# Altium PCB Driver.PcbDoc
Units mm, origin at the board's own origin, x right, y up, seen from the top; angles counter-clockwise.
Board outline 50 x 50 mm, 2 copper layers (Top Layer, Bottom Layer); 21 components, 15 nets, 54 pads, 6 vias.
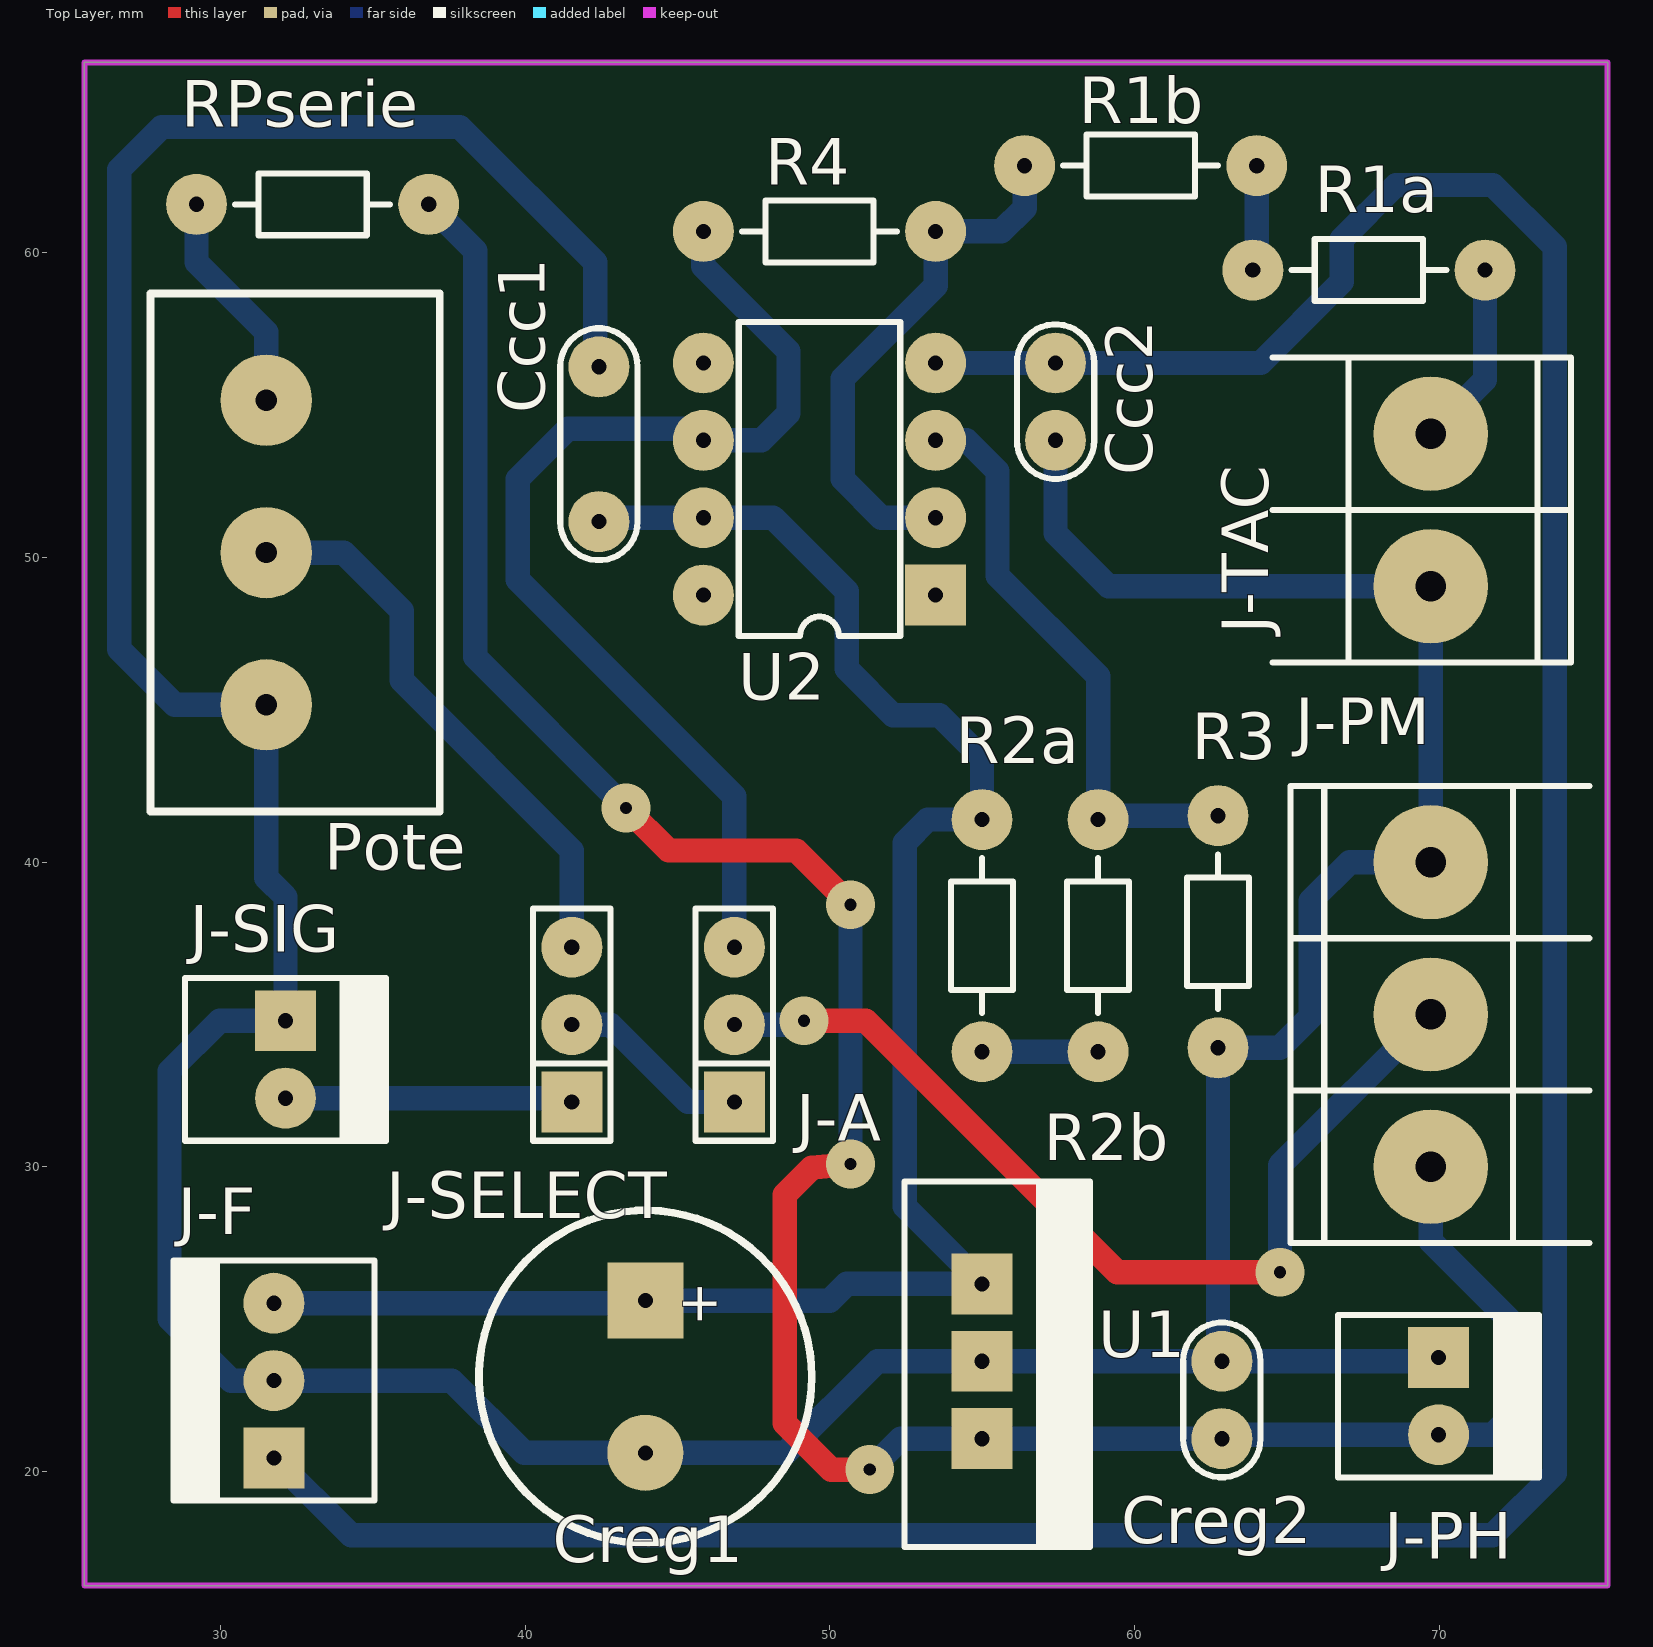
[diagram p0: Top Layer view]
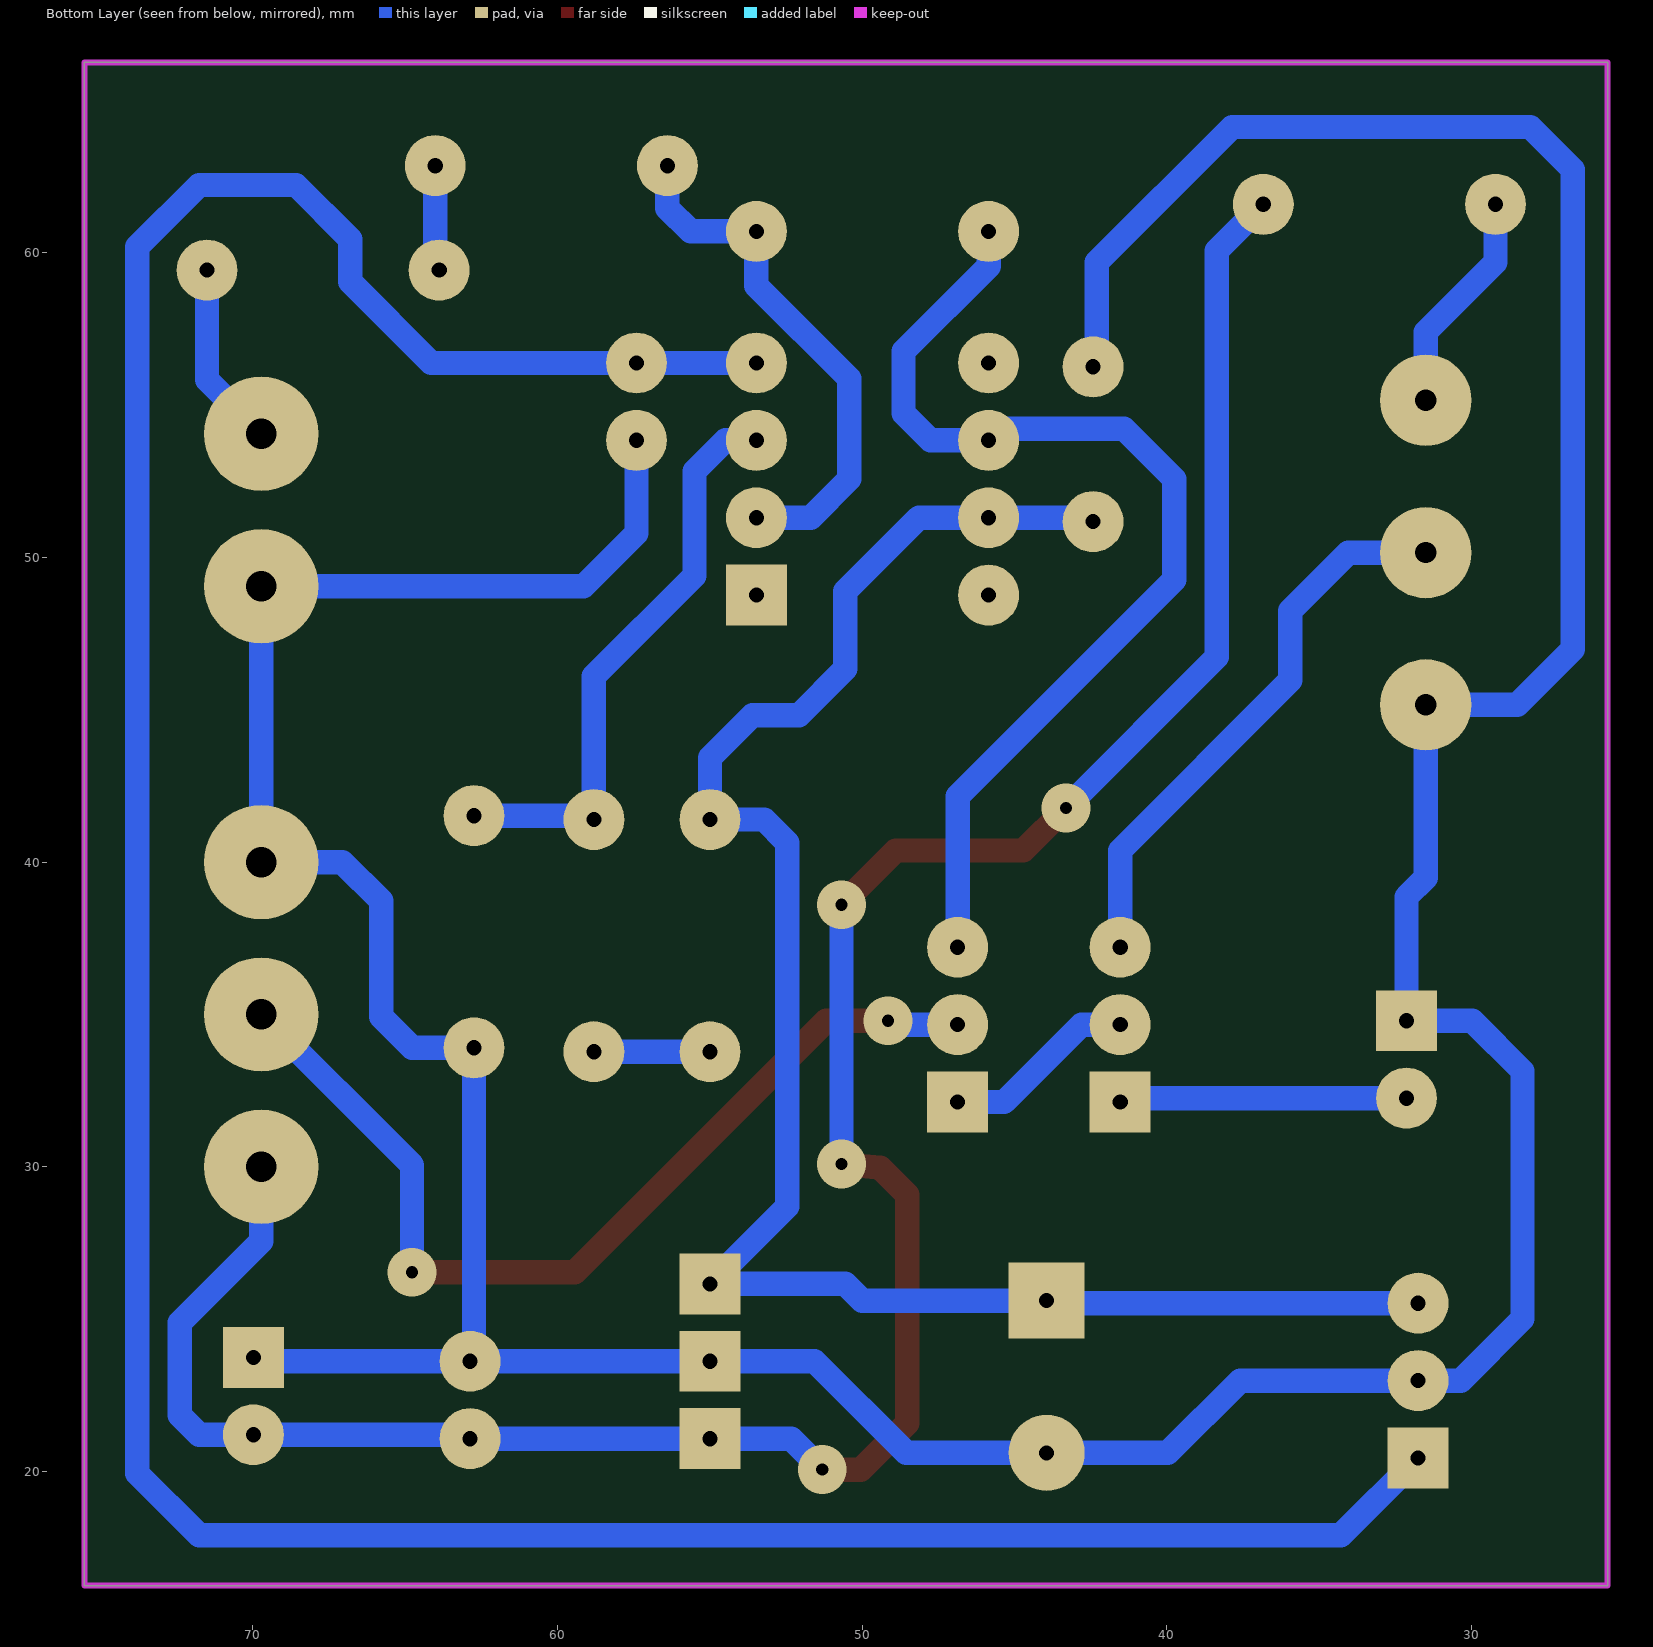
[diagram p1: Bottom Layer view, seen from below]
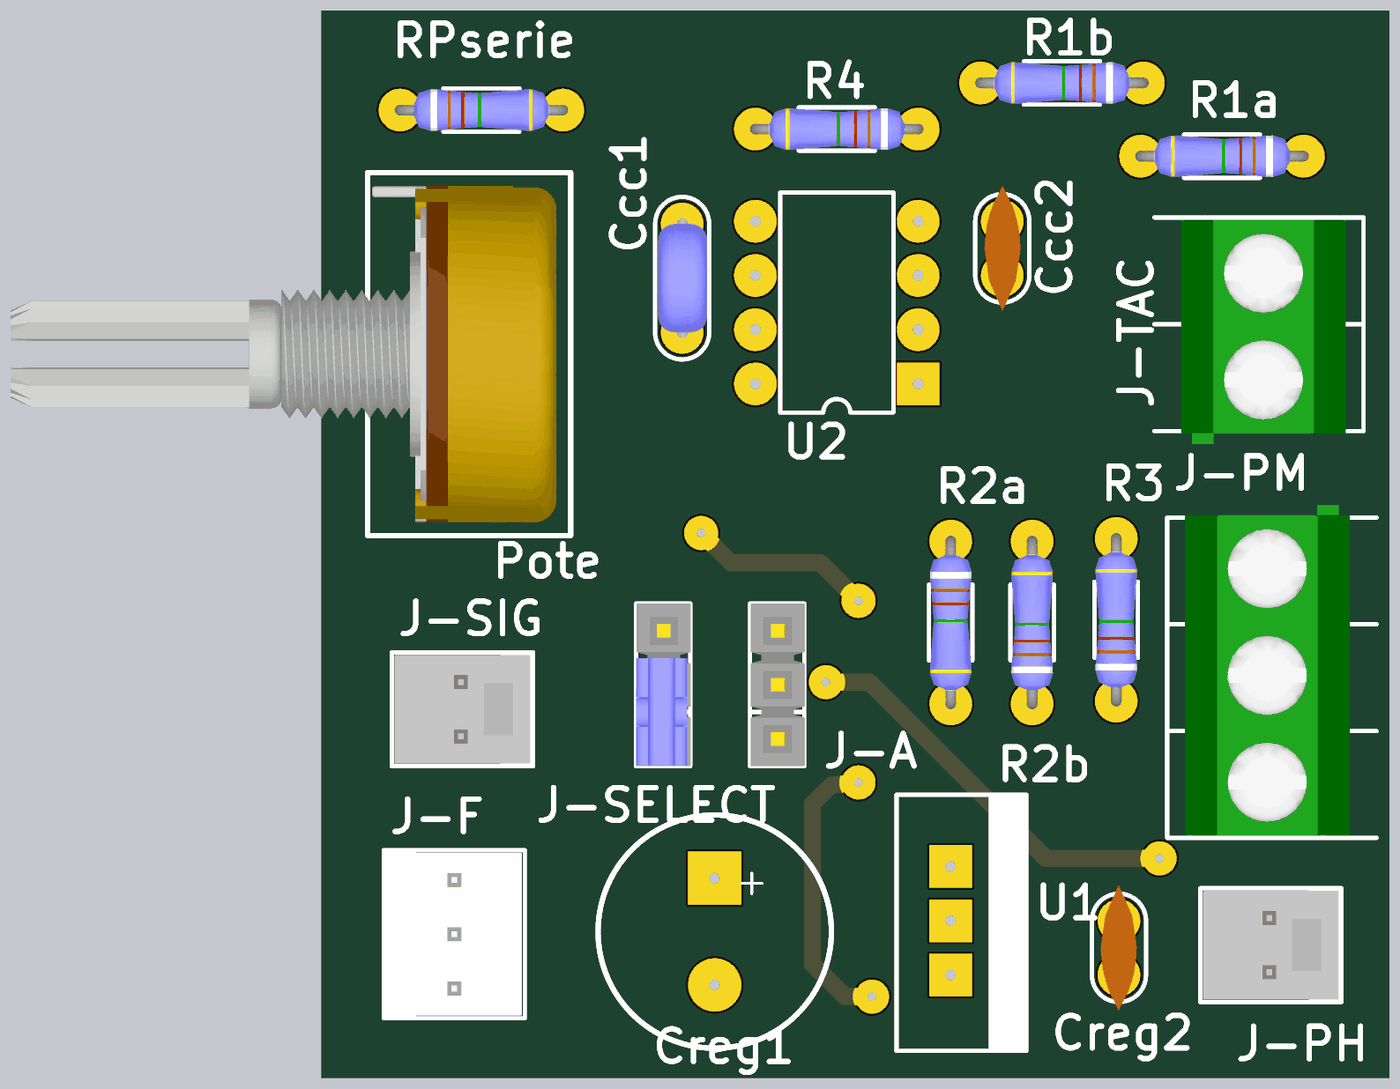
[diagram p2: 3D render of the assembled board from above, using the file's embedded part models]

## Layer stack, top to bottom
Top Solder: solder mask 0.0102, Solder Resist, Dk 3.5
Top Layer: signal copper 0.0356
Dielectric 1: dielectric 0.32, FR-4, Dk 4.8
Bottom Layer: signal copper 0.0356
Bottom Solder: solder mask 0.0102, Solder Resist, Dk 3.5

## Board outline
25.527,16.256 75.527,16.256 75.527,66.256 25.527,66.256

## Design rules (kind name [scope] priority, off if disabled: settings)
Clearance [All] p1: gap=0.3 ignorepadtopadclearanceinfootprint=FALSE
PolygonConnect [All] p1: connectstyle=Relief reliefconductorwidth=0.254 reliefentries=4 polygonreliefangle="90 Angle" airgapwidth=0.254
RoutingVias [All] p1: holewidth=0.6 width=2 viastyle="Through Hole" minholewidth=0.6 minwidth=2 maxholewidth=0.6 maxwidth=2
SolderMaskExpansion [All] p1: expansion=0.102
Width [All] p1: maxlimit=0.9 minlimit=0.6 preferedwidth=0.8
30 further rules are at their usual default settings.

## Components (designator, comment, footprint, x,y, rotation, side; value= is the part's Value field where it differs from the comment)
Ccc1 "100n" CAP200 42.418,53.721 r90 top
Ccc2 "100n" CAP100 57.404,55.118 r270 top
Creg1 "330u" CAP200RP 43.942,23.114 r270 top
Creg2 "100n" CAP100 62.865,22.352 r90 top
J-A "ARDUINO" SIP3 46.863,34.671 r90 top
J-F "FUENTE" MOLEX3 31.75,20.447 r90 top
J-PH "PUENTE H" MOLEX2 69.977,23.749 r270 top
J-PM "POTE MOTOR" BORNERA3 69.723,35.005 r0 top
J-SELECT "A2 SELECT" JUMPER3 41.529,34.671 r90 top
J-SIG "SEÑAL" MOLEX2 32.131,34.798 r270 top
J-TAC "TACOMETRO" BORNERA2 69.723,51.562 r180 top
Pote "5K" POTENCIOMETRO 31.496,50.165 r270 top
R1a "3K9" RES300 71.501,59.436 r180 top
R1b "100" RES300 64.008,62.865 r180 top
R2a "3K9" RES300 54.991,41.402 r270 top
R2b "100" RES300 58.801,33.782 r90 top
R3 "1K" RES300 62.738,33.909 r90 top
R4 "1K" RES300 53.467,60.706 r180 top
RPserie "1K" RES300 29.21,61.595 r0 top
U1 "7806" "TO-220 V" 54.991,23.622 r270 top
U2 "TL081JG" JG008 49.657,52.578 r90 top

## Footprints (in the part's own frame and the unit in brackets; to place one, negate y for a bottom-side part, rotate by r counter-clockwise, add the part's x,y. Pads: shape width x height; smd on the part's side, far side on the other; paste and mask are expansions set on the pad)
BORNERA2 [mm] "Bornera con Tornillos 5mm separación"
  round 3.75 hole 1: 1(0,2.5) 2(0,-2.5)
  silkscreen extent -4.6,-5 5.2,5, body extent -3.76,-4.89 3.94,5.61, height 10
BORNERA3 [mm] "Bornera con Tornillos 5mm separación"
  round 3.75 hole 1: 1(0,5) 2(0,0) 3(0,-5)
  silkscreen extent -4.6,-7.5 5.2,7.5, body extent -3.76,-7.39 3.94,8.11, height 10.05
CAP100 [mm]
  round 2 hole 0.5: 1(-1.27,0) 2(1.27,0)
  silkscreen extent -2.54,-1.27 2.54,1.27, body extent -2.92,-0.84 2.92,0.86, height 6.12
CAP200 [mm]
  round 2 hole 0.5: 1(-2.54,0) 2(2.54,0)
  silkscreen extent -3.81,-1.27 3.81,1.27, body extent -2.79,-1.17 2.79,1.12, height 6.24
CAP200RP [mm] "Body Diameter 10.33mm"
  rect 2.5x2.5 hole 0.5: 1(-2.5,0)
  round 2.5 hole 0.5: 2(2.5,0)
  silkscreen extent -5.46,-5.46 5.46,5.46, body extent -5.2,-5.18 5.18,5.21, height 20
JG008 [mm] "DIP; 8 Leads; Row Spacing 7.62 mm; Pitch 2.54 mm"
  rect 2x2 hole 0.5: 1(-3.81,-3.81)
  round 2 hole 0.5: 2(-1.27,-3.81) 3(1.27,-3.81) 4(3.81,-3.81) 5(3.81,3.81) 6(1.27,3.81) 7(-1.27,3.81) 8(-3.81,3.81)
  silkscreen extent -5.15,-2.65 5.15,2.65
JUMPER3 [mm]
  rect 2x2 hole 0.5: 1(-2.54,0)
  round 2 hole 0.5: 2(0,0) 3(2.54,0)
  silkscreen extent -3.81,-1.27 3.81,1.27, body extent -3.81,-1.3 3.81,1.27, height 16.15
MOLEX2 [mm]
  rect 2x2 hole 0.5: 1(0,0)
  round 2 hole 0.5: 2(2.54,0)
  silkscreen extent -1.4,-3.3 3.94,3.3, body extent -1.27,-3.18 3.81,3.18, height 10.74
MOLEX3 [mm]
  rect 2x2 hole 0.5: 1(0,0)
  round 2 hole 0.5: 2(2.54,0) 3(5.08,0)
  silkscreen extent -1.4,-3.3 6.48,3.3, body extent -1.27,-3.17 6.35,3.18, height 10.74
POTENCIOMETRO [mm]
  round 3 hole 0.7: 1(-5,0) 2(0,0) 3(5,0)
  silkscreen extent -8.5,-3.8 8.5,5.7, body extent -7.87,-20.53 7.87,5.03, height 20.12
RES300 [mm]
  round 2 hole 0.5: 1(0,0) 2(7.62,0)
  silkscreen extent 1.27,-1.02 6.35,1.02, body extent -0.25,-0.97 7.87,0.97, height 2.01
SIP3 [mm]
  rect 2x2 hole 0.5: 1(-2.54,0)
  round 2 hole 0.5: 2(0,0) 3(2.54,0)
  silkscreen extent -3.81,-1.27 3.81,1.27, body extent -3.81,-1.3 3.81,1.24, height 8.38
"TO-220 V" [mm]
  rect 2x2 hole 0.5: 1(-2.54,0) 2(0,0) 3(2.54,0)
  silkscreen extent -5.9,-2.54 6.1,3.54, body extent -5,-2 5,3, height 18

## Part data
Ccc1 Ccc2 Creg2: library part CAP
Creg1: library part CAPPOL
J-A: library part CON3
J-F: library part MOLEX3
J-PH J-SIG: library part MOLEX2
J-PM: library part "BORNERA 3"
J-SELECT: library part JUMPER3
J-TAC: library part "BORNERA 2"
Pote: library part POTENCIOMETRO
R1a R1b R2a R2b R3 R4 RPserie: library part RES
U1: library part 78XX, "REGULDOR POSITIVO"
U2: "JFET-Input Operational Amplifier", ComponentLink1Description="Manufacturer Link", ComponentLink1URL=http://www.ti.com/, ComponentLink2Description=Datasheet, ComponentLink2URL=http://www-s.ti.com/sc/ds/tl081.pdf, DatasheetVersion=Feb-1999, LatestRevisionDate=04-Mar-2005, LatestRevisionNote="Stylized 3D Model Added.", Note="Pin 8 is not connected", PackageDescription="DIP; 8 Leads; Row Spacing 7.62 mm; Pitch 2.54 mm", PackageReference=JG008, PackageVersion=Jan-1995, Published=16-Jan-2001, Publisher="Altium Limited"

## Via types
v1: diameter 1.6, hole 0.4, Top Layer to Bottom Layer, 6 vias

## Nets (pads, with @x,y where several pads share a name; then routed paths per layer and width w, separated by ;. In a path a pad name is that pad's centre, name@x,y a point inside that pad or via, vN(x,y) a via of type N, cw(c..) or ccw(c..) an arc to the next point about the centre after c; other vN are vias at no path point)
+6V: Creg2.1 J-PH.2 J-PM.3 RPserie.2 U1.3 | length 84.2
  Top Layer w0.8: v1(43.307,41.783) 44.704,40.386 48.895,40.386 49.657,39.624 v1(50.673,38.608) ; v1(50.673,30.099) 49.403,29.972 48.514,29.083 48.514,21.59 50.038,20.066 v1(51.308,20.066)
  Bottom Layer w0.8: RPserie.2 38.354,60.071 38.354,46.736 v1(43.307,41.783) ; v1(50.673,30.099) v1(50.673,38.608) ; v1(51.308,20.066) 52.324,21.082 U1.3 Creg2.1 62.992,21.209 J-PH.2 71.755,21.209 72.39,21.844 72.39,24.892 69.723,27.559 J-PM.3
+10V: Ccc1.1 Creg1.1 J-F.3 R2a.1 U1.1 U2.7 | length 61.3
  Bottom Layer w0.8: J-F.3 43.855,25.527 Creg1.1 49.998,25.614 50.546,26.162 U1.1 52.451,28.702 52.451,40.64 53.213,41.402 R2a.1 54.991,43.434 53.594,44.831 52.07,44.831 50.546,46.355 50.546,48.895 48.133,51.308 U2.7 42.545,51.308 Ccc1.1
-10V: Ccc2.1 J-F.1 U2.4 | length 108.6
  Bottom Layer w0.8: J-F.1 34.29,17.907 71.755,17.907 73.787,19.939 73.787,60.198 71.755,62.23 68.58,62.23 66.802,60.452 66.802,59.055 64.135,56.388 Ccc2.1 U2.4
A0: J-A.3 R4.2 U2.6 | length 35.5
  Bottom Layer w0.8: R4.2 45.847,59.563 48.641,56.769 48.641,54.737 47.752,53.848 U2.6 45.466,54.229 41.402,54.229 39.751,52.578 39.751,49.276 46.863,42.164 J-A.3
A1: J-A.2 J-PM.2 | length 31.6
  Top Layer w0.8: v1(49.149,34.798) 51.181,34.798 59.436,26.543 v1(64.77,26.543)
  Bottom Layer w0.8: J-A.2 v1@48.895,34.671 ; v1(64.77,26.543) 64.77,30.052 J-PM.2
A2: J-A.1 J-SELECT.2 | length 6.4
  Bottom Layer w0.8: J-SELECT.2 42.799,34.671 45.339,32.131 J-A.1
GND: Ccc1.2 Ccc2.2 Creg1.2 Creg2.2 J-F.2 J-PH.1 J-PM.1 J-SIG.1 J-TAC.1 Pote.3 R3.1 U1.2 | length 158.1
  Bottom Layer w0.8: Ccc1.2@42.291,56.261 42.291,59.69 37.846,64.135 28.067,64.135 26.67,62.738 26.67,46.99 28.495,45.165 Pote.3 31.496,39.497 32.131,38.862 J-SIG.1 29.972,34.798 28.321,33.147 28.321,25.019 30.353,22.987 J-F.2 37.592,22.987 39.965,20.614 Creg1.2 48.554,20.614 51.562,23.622 U1.2 Creg2.2 ; Ccc2.2 57.404,50.8 59.142,49.062 J-TAC.1 J-PM.1 67.056,40.005 65.786,38.735 65.786,34.925 64.77,33.909 R3.1 62.738,23.749 Creg2.2 ; J-PH.1 69.85,23.622 Creg2.2
NetJ-SELECT_1: J-SELECT.1 J-SIG.2 | length 9.5
  Bottom Layer w0.8: J-SIG.2 41.402,32.258 J-SELECT.1
NetJ-SELECT_3: J-SELECT.3 Pote.2 | length 18.6
  Bottom Layer w0.8: Pote.2 34.036,50.165 35.941,48.26 35.941,45.974 41.529,40.386 J-SELECT.3
NetJ-TAC_2: J-TAC.2 R1a.1 | length 6.1
  Bottom Layer w0.8: J-TAC.2 71.501,55.84 R1a.1
NetPote_1: Pote.1 RPserie.1 | length 7.4
  Bottom Layer w0.8: RPserie.1 29.21,59.69 31.496,57.404 Pote.1
NetR1a_2: R1a.2 R1b.1 | length 3.5
  Bottom Layer w0.8: R1a.2 64.008,59.563 R1b.1
NetR1b_2: R1b.2 R4.1 U2.2 | length 17.6
  Bottom Layer w0.8: U2.2 51.689,51.308 50.419,52.578 50.419,55.88 53.467,58.928 R4.1 55.626,60.706 56.388,61.468 R1b.2
NetR2a_2: R2a.2 R2b.1 | length 3.8
  Bottom Layer w0.8: R2a.2 R2b.1
NetR2b_2: R2b.2 R3.2 U2.3 | length 19.2
  Bottom Layer w0.8: U2.3 54.483,53.848 55.499,52.832 55.499,49.403 58.801,46.101 R2b.2 58.928,41.529 R3.2
pads on no net: U2.1 U2.5 U2.8

## Keep-outs
Keep-Out Layer:
  the board outline again, w0.2

## Text inside footprints (layer, text, board x,y; h text height)
Creg1: Top Overlay "+" at 45.187,26.238 h1.27 r270